# Altium PCB ALTIUM_2020-06-22_00-26-27_2020-07-05_01-07-09.pcbdoc
Units mil, origin at the board's own origin, x right, y up, seen from the top; angles counter-clockwise.
Board outline 4955 x 2915 mil, 2 copper layers (Top Layer, Bottom Layer); 51 components, 55 nets, 159 pads, 40 vias.
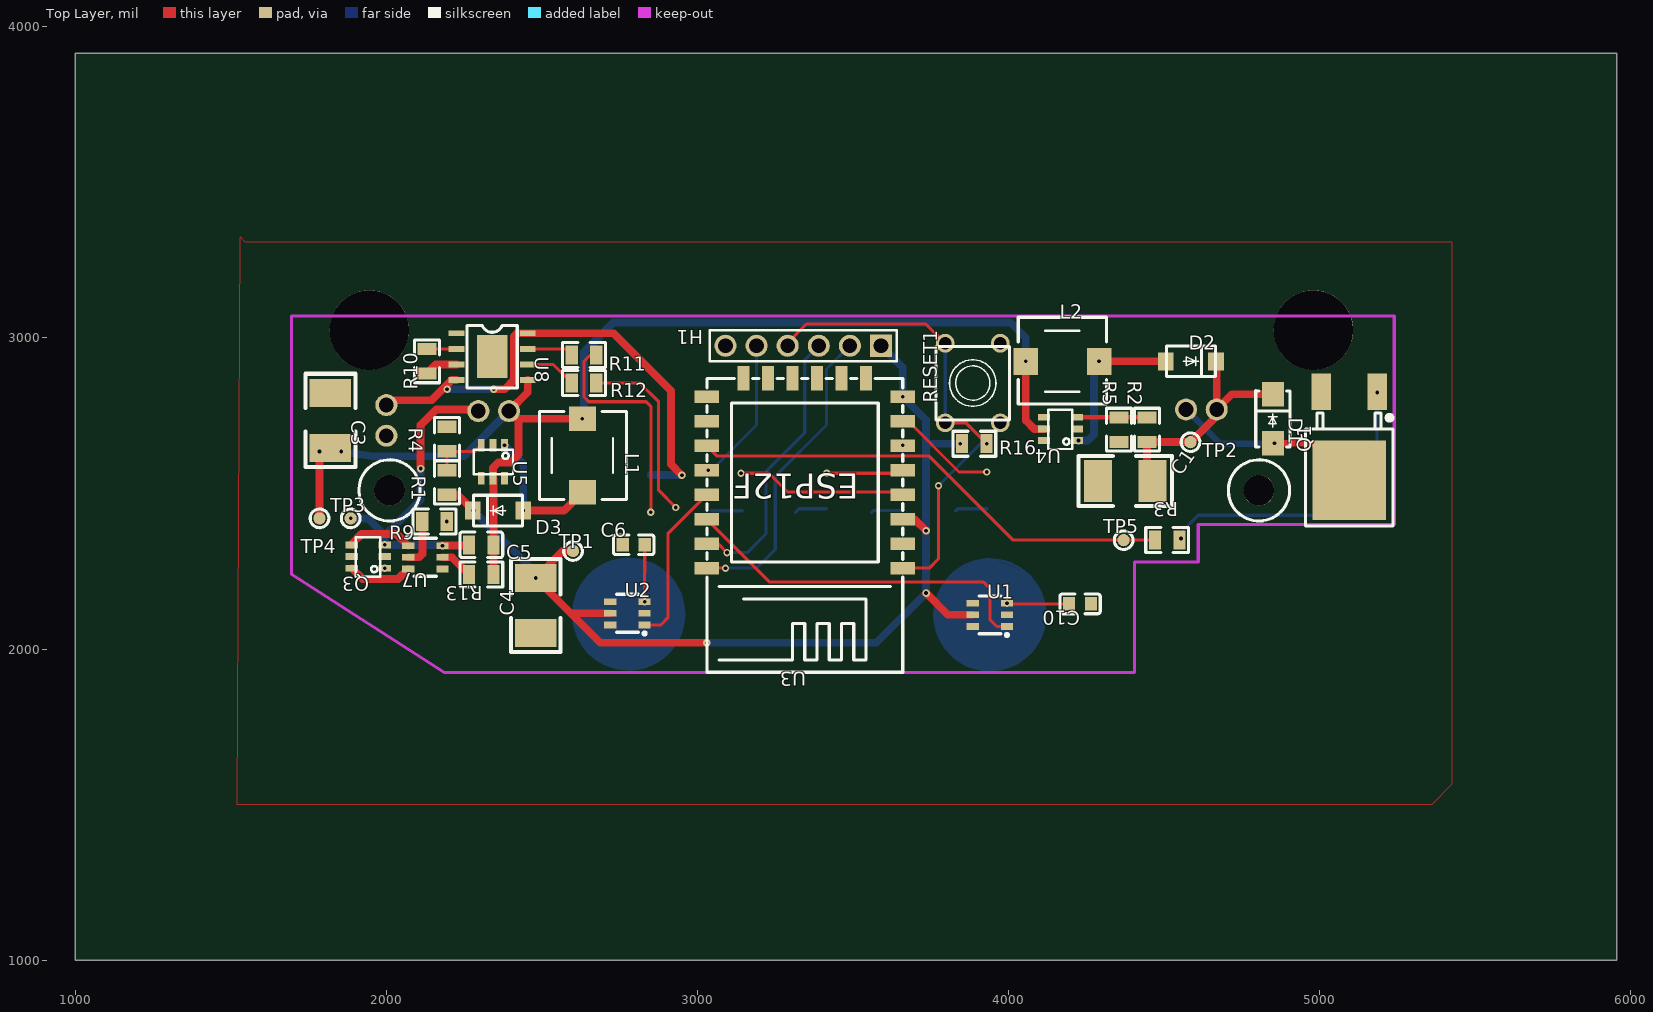
[diagram p0: Top Layer view]
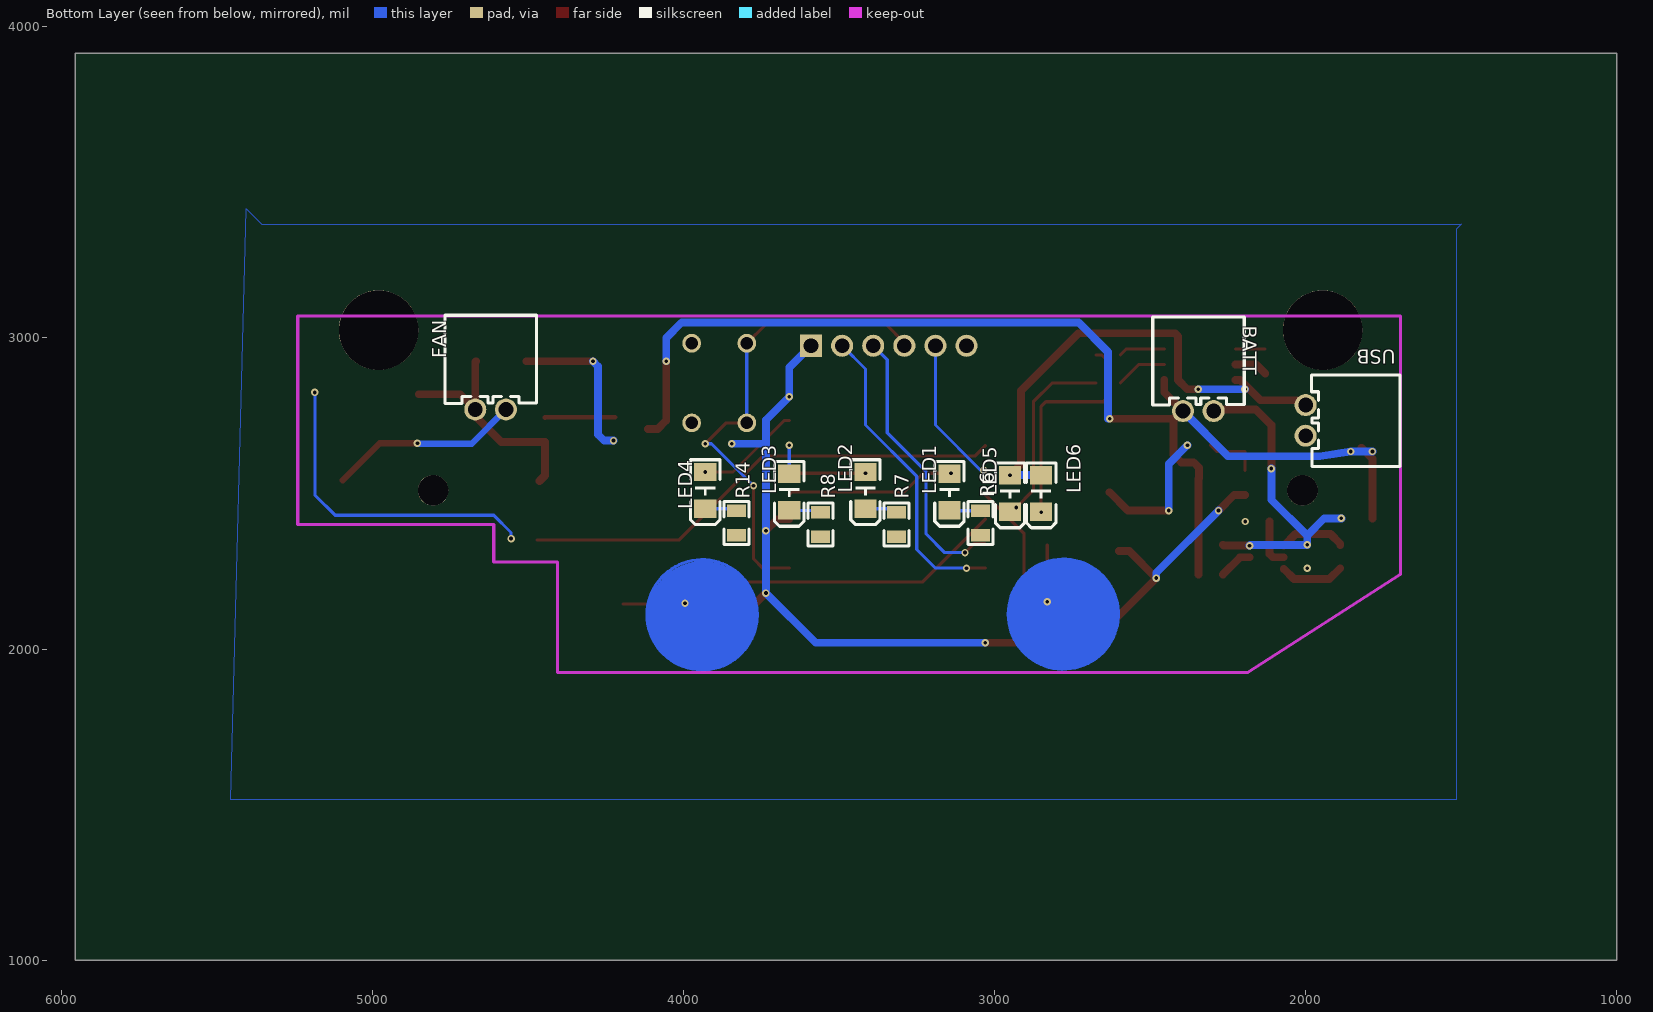
[diagram p1: Bottom Layer view, seen from below]

## Layer stack, top to bottom
Top Layer: signal copper (thickness not stored)
Dielectric: dielectric 12.6, FR-4, Dk 4.8
Bottom Layer: signal copper (thickness not stored)

## Board outline
5955,1000 1000,1000 1000,3915 5955,3915

## Components (designator, comment, footprint, x,y, rotation, side; value= is the part's Value field where it differs from the comment)
BATT "XH-2AW" CONN-TH_2P-P2.50_XH-2AW 2345,2765 r0 bottom
C1 "22uF" 1812 4375,2540 r0 top
C3 "22uF" 1812 1820,2735 r270 top
C4 "22uF" 1812 2480,2140 r90 top
C5 "100nF" C0805 2305,2335 r0 top
C6 "20pF" C0603 2795,2335 r0 top
C10 "20pF" C0603 4230,2145 r180 top
D1 "1N4001G" SMA_L4.4-W2.6-LS5.0-RD 4850,2740 r270 top
D2 "SS34" SMA(DO-214AC) 4590,2925 r0 top
D3 "SS34" SMA(DO-214AC) 2355,2445 r180 top
FAN "XH-2AW" CONN-TH_2P-P2.50_XH-2AW 4620,2770 r0 bottom
H1 "PROG" HDR-TH_6P-P2.54-V 3340,2975 r180 top
L1 "22uH" 7*7*4 2630,2740 r270 top
L2 "22uH" 7*7*4 4055,2925 r0 top
LED1 "Led charged (green)" LED1206-RD 3145,2505 r270 bottom
LED2 "Led charged (green)" LED1206-RD 3415,2510 r270 bottom
LED3 "Led charged (green)" LED1206-RD 3660,2505 r270 bottom
LED4 "Led charged (green)" LED1206-RD 3930,2510 r270 bottom
LED5 "Led charged (green)" LED1206-RD 2950,2500 r270 bottom
LED6 "Led charging (red)" LED1206-R-RD 2850,2500 r270 bottom
Q1 "NCE65T680K" TO-252-2_L6.6-W6.1-P4.57-LS9.9-BR-CW 5095,2685 r90 top
Q3 "FS8205" SOT-23-6 1995,2260 r180 top
R1 "2K" R0805#1 2195,2535 r270 top
R2 "9.31K" R0805#1 4445,2705 r270 top
R3 "2K" R0805#1 4510,2350 r180 top
R4 "9.31K" R0805#1 2195,2675 r270 top
R5 "590" R0805#1 4355,2705 r270 top
R6 "1K" R0805#2 3045,2405 r270 bottom
R7 "1K" R0805#2 3315,2400 r270 bottom
R8 "1K" R0805#2 3560,2400 r270 bottom
R9 "2K" R0805#1 2155,2410 r180 top
R10 "2K" R0805#1 2130,2925 r90 top
R11 "1K" R0805#1 2635,2945 r0 top
R12 "1K" R0805#1 2635,2855 r0 top
R13 "100" R0805#1 2305,2240 r180 top
R14 "1K" R0805#2 3830,2405 r270 bottom
R16 "2K" R0805#1 3890,2660 r0 top
RESET1 "RESET" "TACTILE SWITCH THT 6X6MM" 3885,2855 r90 top
TP1 "TEST_PAD" TESTPAD0 2600,2315 r0 top
TP2 "TEST_PAD" TESTPAD0 4585,2665 r0 top
TP3 "TEST_PAD" TESTPAD0 1885,2420 r0 top
TP4 "TEST_PAD" TESTPAD0 1785,2420 r0 top
TP5 "TEST_PAD" TESTPAD0 4370,2350 r0 top
U1 "TTP233D-BA6" SOT-23-6_L2.9-W1.6-P0.95-LS2.8-BR 3940,2110 r0 top
U2 "TTP233D-BA6" SOT-23-6_L2.9-W1.6-P0.95-LS2.8-BR 2775,2115 r0 top
U3 "ESP-12F(ESP8266MOD)" WIFIM-SMD_ESP-12F-ESP8266MOD 3345,2565 r180 top
U4 "MT3608" SOT-23-6 4220,2670 r180 top
U5 "MT3608" SOT-23-6 2380,2655 r270 top
U7 "FS312F-G" SOT-23-6_L2.9-W1.6-P0.95-LS2.8-BR 2125,2295 r180 top
U8 "TP4056_C382139" ESOP-8_L4.9-W3.9-P1.27-LS6.0-BL-EP 2340,2940 r270 top
USB "XH-2AW" CONN-TH_2P-P2.50_XH-2AW 2000,2735 r90 bottom

## Footprints (in the part's own frame and the unit in brackets; to place one, negate y for a bottom-side part, rotate by r counter-clockwise, add the part's x,y. Pads: shape width x height; smd on the part's side, far side on the other; paste and mask are expansions set on the pad)
7*7*4 [mil]
  rect 79x86.62 smd: 1(0,0) 2(236,0)
  silkscreen extent -24,-138 260,142
1812 [mil]
  rect 90x133.86 smd: 1(-88,0) 2(88,0)
  silkscreen extent -150,-80 150,80
C0603 [mm]
  rect 1x1.1 smd: 1(-0.9,0) 2(0.9,0)
  silkscreen extent -1.65,-0.8 1.65,0.8
C0805 [mm]
  rect 1x1.55 smd: 1(-1,0) 2(1,0)
  silkscreen extent -1.75,-1.04 1.75,1.04
CONN-TH_2P-P2.50_XH-2AW [mm]
  round 1.8 hole 1.199: 1(1.251,0) 2(-1.251,0)
  silkscreen extent -3.75,-7.7 3.71,-0.48
ESOP-8_L4.9-W3.9-P1.27-LS6.0-BL-EP [mil]
  rect 18.9x51.18 smd: 1(-75,-114.5) 2(-25,-114.5) 3(25,-114.5) 4(75,-114.5) 5(75,114.5) 6(25,114.5) 7(-25,114.5) 8(-75,114.5)
  rect 137.8x98.42 smd: 9(0,0)
  silkscreen extent -100,-81 100,81
HDR-TH_6P-P2.54-V [mm]
  rect 1.8x1.8 hole 1.2: 1(-6.35,0)
  round 1.8 hole 1.2: 2(-3.81,0) 3(-1.27,0) 4(1.27,0) 5(3.81,0) 6(6.35,0)
  silkscreen extent -7.62,-1.27 7.62,1.27
LED1206-R-RD [mm]
  rect 1.5x1.8 smd: 1(-1.5,0) 2(1.5,0)
  silkscreen extent -2.5,-1.2 2.8,1.2
LED1206-RD [mm]
  rect 1.5x1.8 smd: 1(1.5,0) 2(-1.5,0)
  silkscreen extent -2.5,-1.2 2.8,1.2
R0805#1 [mm]
  rect 1x1.55 smd: 1(-1,0) 2(1,0)
  silkscreen extent -1.75,-1.02 1.75,1.02
R0805#2 [mm]
  rect 1x1.55 smd: 1(1,0) 2(-1,0)
  silkscreen extent -1.75,-1.02 1.75,1.02
SMA(DO-214AC) [mil]
  rect 50x57.9 smd: 1(-85,0) 2(77,0)
  silkscreen extent -82,-49 75,49
SMA_L4.4-W2.6-LS5.0-RD [mm]
  rect 2x1.8 smd: 1(-2,0) 2(2,0)
  silkscreen extent -2.3,-1.4 2.3,1.4
SOT-23-6 [mm]
  rect 1x0.55 smd: 1(0,0) 2(0,-0.95) 3(0,-1.9) 4(2.7,-1.9) 5(2.7,-0.95) 6(2.7,0)
  silkscreen extent 0.38,-2.51 2.36,0.69
SOT-23-6_L2.9-W1.6-P0.95-LS2.8-BR [mm]
  rect 1x0.55 smd: 1(1.4,-0.95) 2(1.4,0) 3(1.4,0.95) 4(-1.4,0.95) 5(-1.4,0) 6(-1.4,-0.95)
  silkscreen extent -0.9,-1.78 1.52,1.55
"TACTILE SWITCH THT 6X6MM" [mm]
  round 1.524 hole 1: 1(-3.25,-2.25) 2(3.25,-2.25) 3(-3.25,2.25) 4(3.25,2.25)
  silkscreen extent -3,-3 3,3
TESTPAD0 [mm]
  round 1 smd: 1(0,0)
  silkscreen extent -0.76,-0.76 0.76,0.76
TO-252-2_L6.6-W6.1-P4.57-LS9.9-BR-CW [mil]
  rect 118.1x63 smd: 1(142.4,-89.96)
  rect 255.9x236.2 smd: 2(-142.4,0)
  rect 118.2x63 smd: 3(142.15,89.96)
  silkscreen extent -290,-141 74,141
WIFIM-SMD_ESP-12F-ESP8266MOD [mm]
  rect 2x1 smd: 1(-8.002,7.751) 2(-8.002,5.751) 3(-8.002,3.751) 4(-8.002,1.751) 5(-8.002,-0.25) 6(-8.002,-2.25) 7(-8.002,-4.249) 8(-8.001,-6.249) 9(7.999,-6.249) 10(8,-4.249) 11(8.002,-2.25) 12(8.001,-0.25) 13(8,1.751) 14(8.001,3.751) 15(8,5.751) 16(8.001,7.751)
  rect 1x2 smd: 17(-5,-7.751) 18(-3.002,-7.749) 19(-1.003,-7.749) 20(0.998,-7.749) 21(2.997,-7.749) 22(4.997,-7.75)
  silkscreen extent -8,-7.75 8,16.25

## Free pads (board coordinates)
  round 255.91 hole 255.91 unplated: ""(1945,3025) ""(4980,3025)
  round 98.43 hole 98.43 unplated: ""(2010,2510) ""(4805,2510)

## Via types
v1: diameter 23.62, hole 12, Top Layer to Bottom Layer, 20 vias
v2: diameter 24, hole 12, Top Layer to Bottom Layer, 20 vias

## Nets (pads, with @x,y where several pads share a name; then routed paths per layer and width w, separated by ;. In a path a pad name is that pad's centre, name@x,y a point inside that pad or via, vN(x,y) a via of type N, cw(c..) or ccw(c..) an arc to the next point about the centre after c; other vN are vias at no path point)
+3.3V: C4.2 D3.2 H1.1 R1.2 R16.1 TP1.1 U1.5 U2.5 U3.3 U3.8 | length 3331
  Top Layer w25: R1.2 2229.4,2495.6 v2(2280,2445) ; TP1.1 2567,2315 v2(2480,2228) 2593,2115 ; U2.5 2593,2115 ; v2(3030,2020) 2688,2020 2593,2115 ; U3.3 3697.66,2417.34 v1(3735,2380) ; v2(3735,2180) 3805,2110 U1.5
  Bottom Layer w25: v2(2280,2445) 2480,2245 v2(2480,2228) ; v2(3030,2020) 3575,2020 v2(3735,2180) v1(3735,2380) 3735,2736.03 v1(3659.99,2811.04) 3659.99,2905.01 H1.1 ; 3735,2661.17 3736.17,2660 v1(3845,2660)
+10V: C1.2 D1.1 D2.2 FAN.1 R2.2 TP2.1 | length 770.1
  Top Layer w25: C1.2 4445,2558 R2.2 4584.37,2665.63 TP2.1 4669.25,2749.25 FAN.1 ; D2.2 4669.25,2922.75 FAN.1 ; D1.1 4717.99,2818.74 FAN.1
BATTGND: BATT.2 C5.1 Q3.3 TP3.1 U7.6 | length 1046.9
  Top Layer w25: v1(2110,2580) 2110,2720 2160,2770 2290.75,2770 BATT.2 ; v2(2180.12,2332.4) 2263.03,2332.4 C5.1
  Bottom Layer w25: v1(1885,2420) 1940,2420 1995,2365 ; v1(2110,2580) 2110,2480 1995,2365 ; v2(2180.12,2332.4) 2177.72,2334.8 v2(1994.99,2334.8) 1995,2365
D2_1: D2.1 L2.2 U4.1 | length 513.9
  Top Layer w25: v1(4291,2925) D2.1
  Bottom Layer w25: v1(4225,2670) 4254.94,2670 4275,2690.06 4275,2909 v1(4291,2925)
ESP_FLASH: H1.5 U3.12 | length 470.1
  Bottom Layer w10: v1(3035,2575) 3045,2575 3190,2720 H1.5
ESP_RST: H1.4 R16.2 RESET1.3 RESET1.4 U3.1 | length 1557.6
  Top Layer w10: H1.4 3290,2985 3350,3045 3734.37,3045 RESET1.4 ; U3.1 3745,2260 3775,2290 v1(3775,2525) ; RESET1.3@3796.42,2727.05 3862.95,2727.05 v1(3930,2660)
  Bottom Layer w10: v1(3775,2525) 3910,2660 v1(3930,2660) ; RESET1.3 RESET1.4
ESP_RX: H1.3 U3.15 | length 902.1
  Top Layer w10: U3.15 3066.4,2338.6 v1(3095,2310)
  Bottom Layer w10: v1(3095,2310) 3160,2310 3220,2370 3220,2570 3345,2695 3345,2930 H1.3
ESP_TX: H1.2 U3.16 | length 999.3
  Top Layer w10: U3.16 3089.86,2259.86 v1(3090,2260)
  Bottom Layer w10: v1(3090,2260) 3190,2260 3250,2320 3250,2555 3415,2720 3415,2900 H1.2
FAN_2: D1.2 FAN.2 Q1.2 | length 619
  Top Layer w20: D1.2 4976.34,2661.26 Q1.2
  Bottom Layer w20: FAN.2 4680.75,2660 v1@4850,2660
  other v1: 4855.39,2661.26
GND: C1.1 C3.1 C4.1 C6.1 C10.1 H1.6 Q1.3 Q3.1 R4.1 R5.2 R6.1 R7.1 R8.1 R9.1 R10.1 R14.1 RESET1.1 RESET1.2 U1.2 U1.4 U1.6 U2.2 U2.4 U2.6 U3.9 U3.10 U4.2 U5.2 U8.1 U8.3 USB.2 | length 107.7
  Top Layer w25: R10.1 2159.37,2915 U8.3
  other v1: 1994.99,2260 2194.37,2410
INPUT_ONOFF: U1.1 U3.14 | length 1166.4
  Top Layer w10: U3.14 3232.4,2215 3920,2215 3940,2195 3940,2095 3962.4,2072.6 U1.1
INPUT_SPEED: U2.1 U3.13 | length 532
  Top Layer w10: U2.1 2882.6,2077.6 2905,2100 2905,2371.04 U3.13
LED5_1: LED5.1 R12.2 | length 588.3
  Top Layer w10: R12.2 2815,2855 2875,2795 2875,2510 v2(2930,2455)
LED6_2: LED6.2 R11.2 | length 730.1
  Top Layer w10: R11.2 2655,2945 2635,2925 2635,2810 2650,2795 2835,2795 2850,2780 v2(2850,2440)
LED_SPEED_1: LED1.2 U3.4 | length 548.6
  Top Layer w10: v2(3140,2565) 3230,2565 3290,2505 3651.1,2505 U3.4
LED_SPEED_2: LED2.2 U3.5 | length 249.1
  Top Layer w10: v2(3415,2565) 3650.2,2565 U3.5
LED_SPEED_3: LED3.2 U3.6 | length 90.9
  Bottom Layer w10: LED3.2 v1(3660,2655)
LED_SPEED_4: LED4.2 U3.7 | length 338.7
  Top Layer w10: U3.7@3660,2735 3675,2735 3840.9,2569.1 v1@3930,2569.1
  other v1: 3930,2569.05
OUTPUT_FAN: R3.2 TP5.1 U3.11 | length 1566.4
  Top Layer w10: U3.11 3063.5,2620 3745,2620 4015,2350 R3.2
Q1_1: Q1.1 R3.1 | length 1030
  Bottom Layer w10: v2(4554.37,2355) 4554.37,2374.37 4610,2430 5120,2430 5185,2495 v1(5185,2825)
Q3_2: Q3.2
Q3_5: Q3.5
R2_1: R2.1 R5.1 U4.3 | length 225.2
  Top Layer w15: U4.3 4444.57,2744.8 R2.1
R6_2: LED1.1 R6.2 | length 100.7
  Bottom Layer w10: R6.2 3143.43,2444.37 LED1.1
R7_2: LED2.1 R7.2 | length 104.8
  Bottom Layer w10: R7.2 3326.57,2450.94 LED2.1
R8_2: LED3.1 R8.2 | length 102.7
  Bottom Layer w10: R8.2 3566.57,2445.94 LED3.1
R14_2: LED4.1 R14.2 | length 102.7
  Bottom Layer w10: R14.2 3836.57,2450.95 LED4.1
S$1641: 
S$1643: 
TOUCHPAD_ONOFF: C10.2 U1.3 | length 1784.9
  Top Layer w10: v1(3995.12,2147.4) 3997.52,2145 C10.2
  Bottom Layer w10: 4117.17,2110 ccw(c3940,2110) 4117.17,2110
  Bottom Layer w200: 4013.92,2107.16 ccw(c3938.92,2107.16) 4013.92,2107.16
TOUCHPAD_SPEED: C6.2 U2.3 | length 1767
  Top Layer w10: v1(2830.1,2152.4) C6.2
  Bottom Layer w10: 2956.09,2112.16 ccw(c2778.92,2112.16) 2956.09,2112.16
  Bottom Layer w200: 2853.92,2112.16 ccw(c2778.92,2112.16) 2853.92,2112.16
U3_2: U3.2
U3_17: U3.17
U3_18: U3.18
U3_19: U3.19
U3_20: U3.20
U3_21: U3.21
U3_22: U3.22
U4_4: U4.4
U4_6: U4.6
U5_1: D3.1 L1.2 U5.1 | length 444.3
  Top Layer w25: v2(2440,2445) 2571,2445 L1.2
  Bottom Layer w25: v2(2380,2655) 2440,2595 v2@2440,2450
U5_3: R1.1 R4.2 U5.3 | length 179.5
  Top Layer w10: R1.1 R4.2 2285.84,2635.63 U5.3
U5_4: U5.4
U5_6: U5.6
U7_1: Q3.4 U7.1 | length 213.6
  Top Layer w25: Q3.4 1888.71,2338.71 1920,2370 2032.28,2370 U7.1
U7_2: R9.2 U7.2 | length 154.5
  Top Layer w25: U7.2 2105,2295 2115.63,2305.63 R9.2
U7_3: Q3.6 U7.3 | length 209.2
  Top Layer w25: Q3.6 1923.71,2225 2037.28,2225 U7.3
U7_4: U7.4
U7_5: R13.2 U7.5 | length 108.3
  Top Layer w25: U7.5 2210.63,2295 R13.2
U8_2: R10.2 U8.2 | length 95.5
  Top Layer w10: R10.2 U8.2
U8_6: R12.1 U8.6 | length 166
  Top Layer w10: U8.6 2535.63,2915 R12.1
U8_7: R11.1 U8.7 | length 149.4
  Top Layer w10: U8.7 2575.63,2965 R11.1
U8_9: U8.9
VBATT: BATT.1 C3.2 C5.2 L1.1 L2.1 R13.1 TP4.1 U4.5 U5.5 U8.5 | length 3912.6
  Top Layer w25: TP4.1 1785,2612 C3.2 ; R13.1 2344.37,2546.93 U5.5 2342.6,2582.6 2360,2600 2400,2600 2425,2625 2425,2740 2400,2765 BATT.1@2394.3,2765 ; U8.5 2454.5,2825.25 BATT.1 2419.25,2740 v2(2630,2740) ; v2(4055,2925) 4055,2735 4082.6,2707.4 U4.5
  Bottom Layer w25: v2(1785,2635) v2(1855,2635) 1954.6,2620 2249.3,2620 BATT.1@2394.3,2765 ; v2@2635,2740 2635,2955 2730,3050 4005,3050 4055,3000 v2(4055,2925)
VIN: LED5.2 LED6.1 U8.4 U8.8 USB.1 | length 1606.7
  Top Layer w25: USB.1@2000,2784.3 2000,2800 2145,2800 2210,2865 U8.4 ; v2(2345,2835) 2380,2835 2410,2865 2410,3005 2420,3015 U8.8 2730,3015 2915,2830 2915,2594.1 v2@2950,2559.1
  Bottom Layer w25: v2(2195,2835) v2(2345,2835) ; LED6.1@2850,2559.05 LED5.2@2950,2559.05
  other v2: 2950,2559.05

## Polygon pours and split planes (outlines as drawn)
GND on Top Layer (solid): 1530,3325 1545,3310 5425,3310 5425,1565 5360,1500 1520,1500
GND on Bottom Layer (solid): 5405,3415 5355,3365 1500,3365 1515,3350 1515,1515 5455,1515

## Silkscreen, mask and mechanical layers (free items; w line width, h text height)
Top Overlay:
  circle w10 net S$1643: c4805,2510 r98.43
  circle w10: c2010,2510 r98.43
Bottom Solder:
  circle w200 net TOUCHPAD_SPEED: c2778.92,2112.16 r75
  circle w200 net TOUCHPAD_ONOFF: c3940,2110 r75
Document:
  lines w0.1: 3476.5,2456.5 3478.5,2458.5

## Text inside footprints (layer, text, board x,y; h text height)
U3: Top Overlay "ESP12F" at 3518.32,2563.67 h80 r180